# EAGLE board radio_V12.08.21 (EAGLE 5.01)
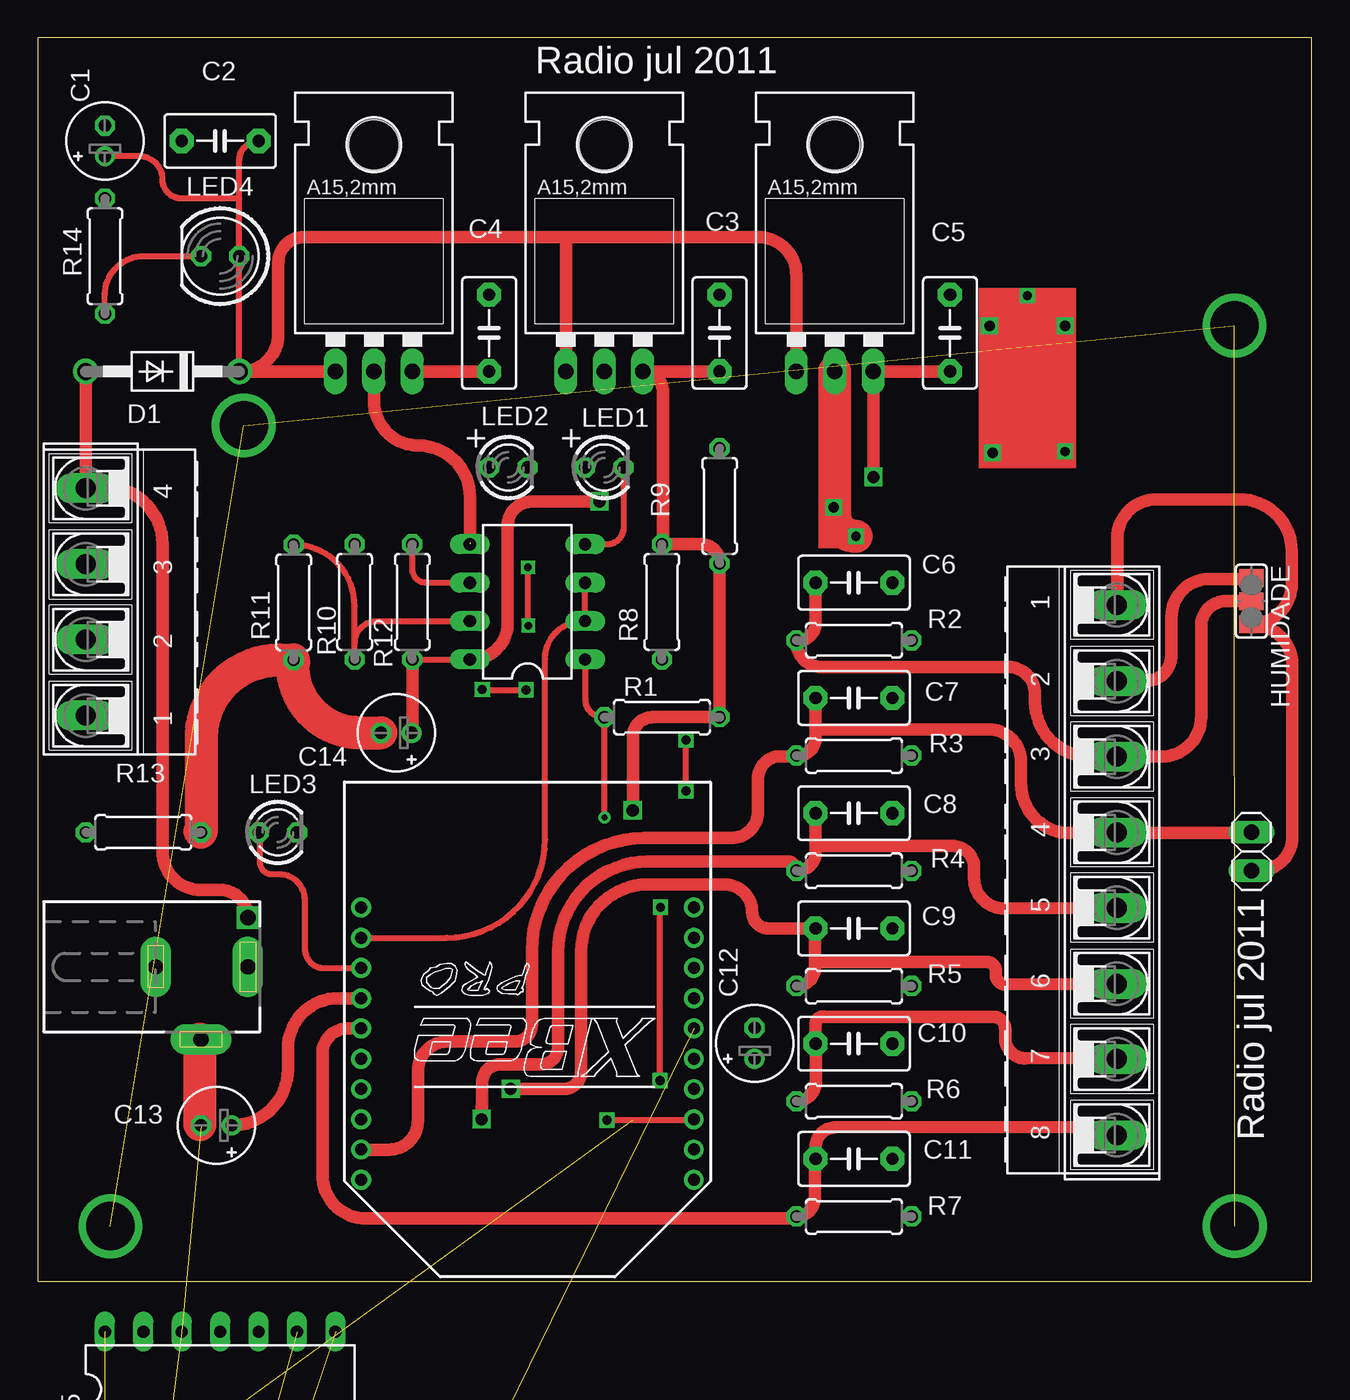
[diagram p0: board, top side]
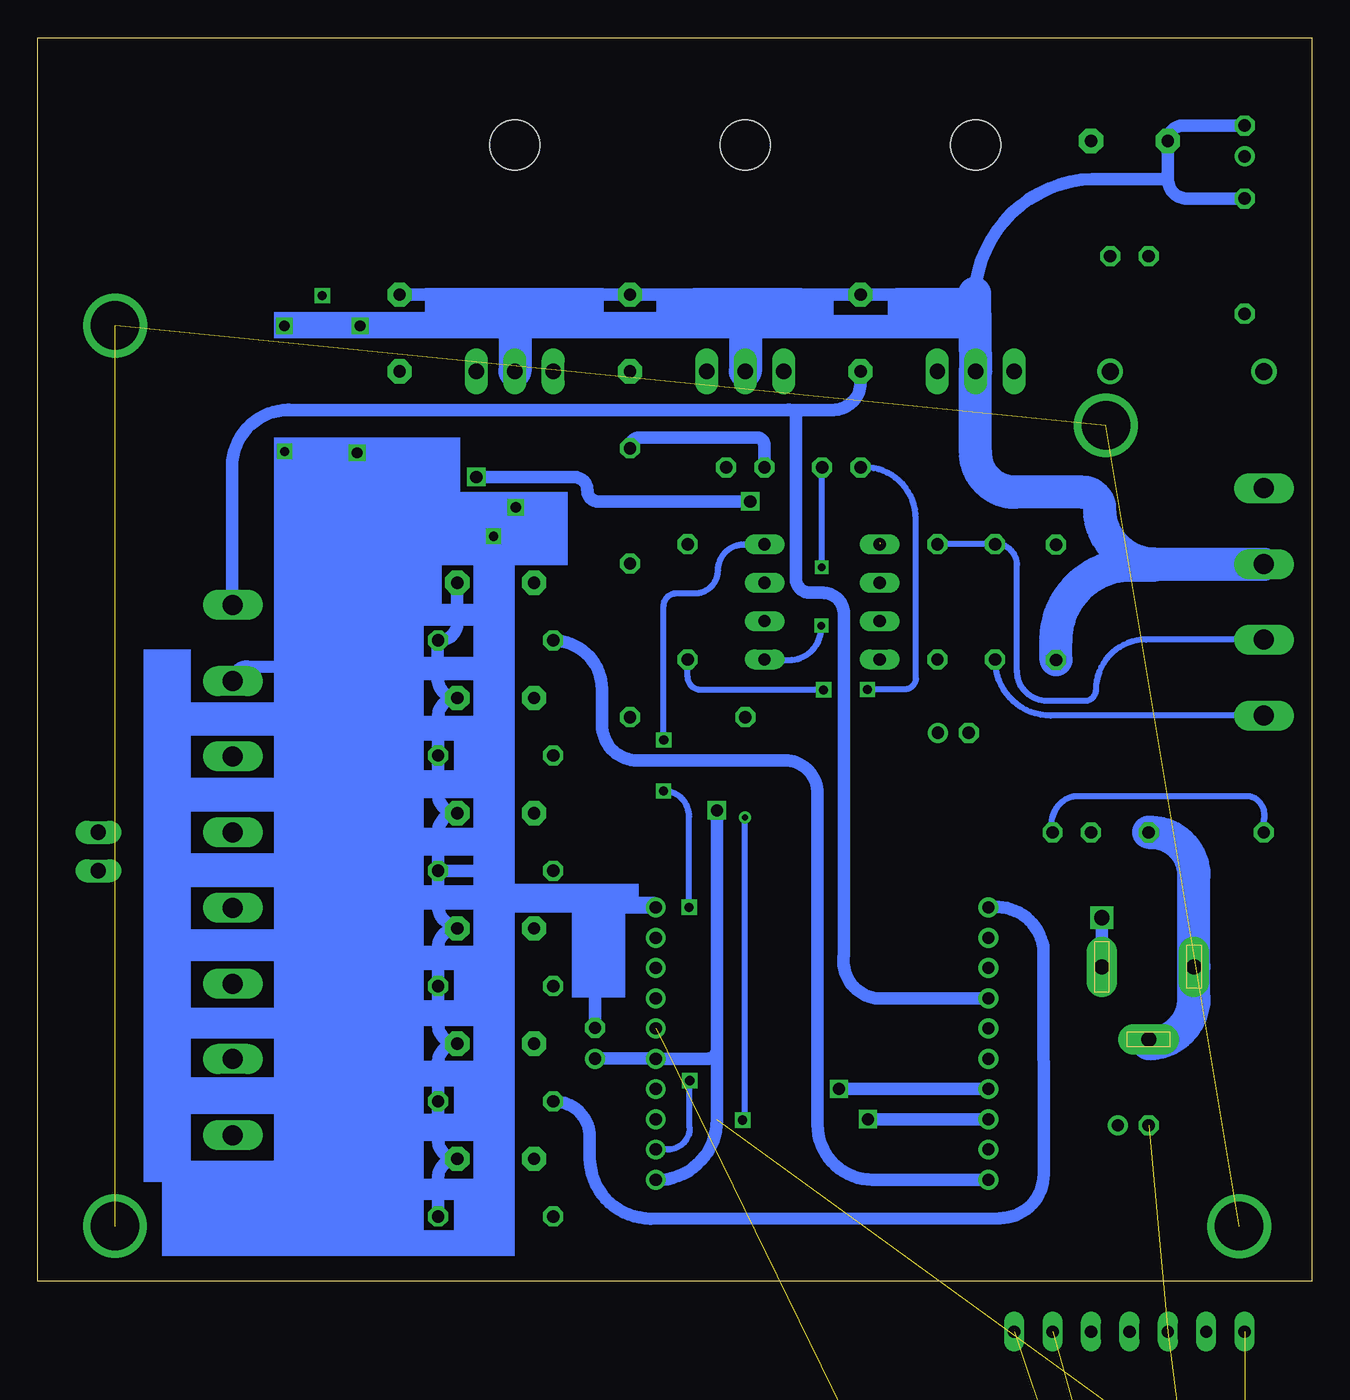
[diagram p1: board, bottom side, seen from below]

Size 84.24 x 82.22 mm. Coordinates in mm from the lower left corner, seen from the top.
Outline: 0,0 84.24,0 84.24,82.22 0,82.22 0,0
Copper layers (1*16): Top 0.035mm / dielectric 1.5mm / Bottom 0.035mm
Design rules "default": minimum track width 10mil, minimum drill 24mil, track to track 8mil, track to pad 8mil, pad to pad 8mil, via to via 8mil, smd to smd 8mil, copper to edge 40mil, drill to drill 8mil, minimum pad ring 10mil, minimum via ring 8mil, stop-mask expansion 4mil, vias tented up to drill 0mil, thermal gap 10mil

## Footprints (pad centres in the part's own frame; a part is rotated, then mirrored left to right if it is on the bottom)
E2-5 = drill 0.813 pad 1.27 round: + -1.016,0 | drill 0.813 pad 1.27 octagon: - 1.016,0
C5B3.5 = drill 0.813 pad 1.6 octagon: 1 -2.54,0; 2 2.54,0
DO41-10 = drill 1.118 round: A 5.08,0; C -5.08,0
SJ_2 = smd 1.168 x 1.6: 1 -1.524,0; 2 0,0; 3 1.524,0
78XXL = drill 1.016 long: GND 0,-3.81; IN -2.54,-3.81; OUT 2.54,-3.81 | hole 3.302: 0,11.176
DIL08 = drill 0.813 long: 1 -3.81,-3.81; 2 -1.27,-3.81; 3 1.27,-3.81; 4 3.81,-3.81; 5 3.81,3.81; 6 1.27,3.81; 7 -1.27,3.81; 8 -3.81,3.81
DIL14 = drill 0.813 long: 1 -7.62,-3.81; 2 -5.08,-3.81; 3 -2.54,-3.81; 4 0,-3.81; 5 2.54,-3.81; 6 5.08,-3.81; 7 7.62,-3.81; 8 7.62,3.81; 9 5.08,3.81; 10 2.54,3.81; 11 0,3.81; 12 -2.54,3.81; 13 -5.08,3.81; 14 -7.62,3.81
DCJ0202 = drill 1 pad 2 long: 1 0,3.1; 2 4.8,0; 3 0,-3
1X02 = drill 1.016 long: 1 -1.27,0; 2 1.27,0
LED3MM = drill 0.813 octagon: A -1.27,0; K 1.27,0
LED5MM = drill 0.813 octagon: A -1.27,0; K 1.27,0
0207/7 = drill 0.813 octagon: 1 -3.81,0; 2 3.81,0
AK500/4-H = drill 1.321 long: 1 -7.518,0; 2 -2.489,0; 3 2.489,0; 4 7.518,0
AK500/8-H = drill 1.321 long: 1 -17.526,0; 2 -12.497,0; 3 -7.518,0; 4 -2.489,0; 5 2.489,0; 6 7.518,0; 7 12.497,0; 8 17.526,0
XBEE-PRO = drill 0.8 pad 1.27 round: 1 -11,9; 2 -11,7; 3 -11,5; 4 -11,3; 5 -11,1; 6 -11,-1; 7 -11,-3; 8 -11,-5; 9 -11,-7; 10 -11,-9; 11 11,-9; 12 11,-7; 13 11,-5; 14 11,-3; 15 11,-1; 16 11,1; 17 11,3; 18 11,5; 19 11,7; 20 11,9

## Placement (x,y rotation side)
C1  10uF  [E2-5]  4.44,75.4 90 top
C2  220nF  [C5B3.5]  12.06,75.4 180 top
C3  220nF  [C5B3.5]  45.08,62.7 90 top
C4  220nF  [C5B3.5]  29.84,62.7 90 top
C5  220nF  [C5B3.5]  60.32,62.7 90 top
C6  470nF  [C5B3.5]  53.97,46.19 180 top
C7  470nF  [C5B3.5]  53.97,38.57 180 top
C8  470nF  [C5B3.5]  53.97,30.95 180 top
C9  470nF  [C5B3.5]  53.97,23.33 180 top
C10  470nF  [C5B3.5]  53.97,15.71 180 top
C11  470nF  [C5B3.5]  53.97,8.09 180 top
C12  10uF  [E2-5]  47.4,15.73 90 top
C13  10uF  [E2-5]  11.81,10.3 180 top
C14  10uF  [E2-5]  23.71,36.27 180 top
C16  1.5u  [E2-5]  3.17,-79.54 0 top  (outside the outline)
D1  1N4004  [DO41-10]  8.25,60.16 180 top
HUMIDADE  [SJ_2]  80.24,44.97 270 top
IC1  3.3  [78XXL]  22.22,63.97 0 top
IC2  LM2937-3.3  [78XXL]  37.46,63.97 0 top
IC3  7805  [78XXL]  52.7,63.97 0 top
IC4  DS96176  [DIL08]  32.38,44.92 90 top
IC5  LM339N  [DIL14]  12.06,-7.15 0 top  (outside the outline)
J2  DCJ0202  [DCJ0202]  10.79,20.79 270 top
JP1  [1X02]  80.25,28.41 90 top
LED1  [LED3MM]  37.46,53.81 0 top
LED2  [LED3MM]  31.11,53.81 0 top
LED3  [LED3MM]  15.87,29.68 0 top
LED4  [LED5MM]  12.06,67.78 180 top
LED5  [LED3MM]  3.17,-16.04 0 top  (outside the outline)
LED6  [LED3MM]  3.17,-21.12 0 top  (outside the outline)
LED7  [LED3MM]  3.17,-26.2 0 top  (outside the outline)
R1  10k  [0207/7]  41.27,37.3 0 top
R2  30k  [0207/7]  53.97,42.38 0 top
R3  30k  [0207/7]  53.97,34.76 0 top
R4  30k  [0207/7]  53.97,27.14 0 top
R5  30k  [0207/7]  53.97,19.52 0 top
R6  30k  [0207/7]  53.97,11.9 0 top
R7  30k  [0207/7]  53.97,4.28 0 top
R8  470  [0207/7]  41.27,44.92 90 top
R9  470  [0207/7]  45.08,51.27 90 top
R10  120  [0207/7]  20.95,44.92 270 top
R11  560  [0207/7]  16.92,44.89 270 top
R12  560  [0207/7]  24.76,44.92 90 top
R13  470  [0207/7]  6.98,29.68 0 top
R14  560  [0207/7]  4.44,67.78 270 top
R15  470  [0207/7]  5.71,-32.55 0 top  (outside the outline)
R16  470  [0207/7]  5.71,-37.63 0 top  (outside the outline)
R17  470  [0207/7]  5.71,-42.71 0 top  (outside the outline)
R18  68k  [0207/7]  5.71,-47.79 0 top  (outside the outline)
R19  56k  [0207/7]  5.71,-52.87 0 top  (outside the outline)
R20  56k  [0207/7]  5.71,-57.95 0 top  (outside the outline)
R21  150k  [0207/7]  5.71,-63.03 0 top  (outside the outline)
R22  100k  [0207/7]  5.71,-68.11 0 top  (outside the outline)
X3  [AK500/4-H]  3.17,44.92 90 top
X4  [AK500/8-H]  71.35,27.19 270 top
XB1  XBEEXBP09DM  [XBEE-PRO]  32.38,15.71 180 top

## Library data of the parts
C1 C12-C14 C16 = rcl
C2-C11 = capacitor-wima
D1 = diode
HUMIDADE = jumper
IC1-IC3 = v-reg
IC4 = maxim
IC5 = linear
J2 = con-jack
JP1 = pinhead
LED1-LED7 = led
R1-R22 = resistor
X3 X4 = con-ptr500
XB1 = maxstream3

## Nets
+3V3: C3.1 C12.+ IC2.OUT IC5.3 R1.2 R8.2 R9.1 R15.1 R16.1 R17.1 R18.2 XB1.1 XB1.5
+5V: C5.1 C14.+ IC3.OUT IC4.8 R12.1
+12V: D1.A J2.1 X3.4
CTS: IC4.2 IC4.3 XB1.12
DIN: IC4.4 LED1.K XB1.2
DIO12: XB1.4
N$2: C1.+ C2.1 D1.C IC1.IN IC2.IN IC3.IN LED4.A
N$3: C6.2 HUMIDADE.2 R2.1 X4.3 XB1.20
N$4: C7.2 JP1.2 R3.1 X4.4 XB1.19
N$5: C8.2 R4.1 X4.5 XB1.18
N$6: C9.2 R5.1 X4.6 XB1.17
N$7: C10.2 R6.1 X4.7 XB1.11
N$8: C11.2 R7.1 X4.8 XB1.15
N$10: LED2.A R8.1
N$11: LED1.A R9.2
N$12: IC4.1 LED2.K R1.1 XB1.3
N$13: LED3.A XB1.13
N$14: LED3.K R13.1
N$15: LED4.K R14.2
N$16: IC4.6 R10.1 R12.2 X3.2
N$17: IC4.7 R10.2 R11.1 X3.1
N$24: IC5.2 LED5.K
N$25: IC5.1 LED6.K
N$26: IC5.14 LED7.K
N$27: LED7.A R17.2
N$28: LED6.A R16.2
N$29: LED5.A R15.2
N$30: IC5.5 R18.1 R19.2
N$31: IC5.7 R19.1 R20.2
N$32: IC5.9 R20.1 R21.2
N$33: C16.+ IC5.4 IC5.6 IC5.8 R22.2
N$36: R22.1 XB1.6
PE: C1.- C2.2 C3.2 C4.2 C5.2 C6.1 C7.1 C8.1 C9.1 C10.1 C11.1 C12.- C13.- C14.- C16.- HUMIDADE.1 IC1.GND IC2.GND IC3.GND IC4.5 IC5.12 J2.2 J2.3 R2.2 R3.2 R4.2 R5.2 R6.2 R7.2 R11.2 R13.2 R14.1 R21.1 X3.3 X4.2 XB1.10
RESERVED: XB1.8
VCC: C4.1 C13.+ HUMIDADE.3 IC1.OUT JP1.1 X4.1 XB1.14

## Tracks (layer width: path | path; a pad name or v marks a point on that pad's centre or on a via)
+3V3  (via drill 0.8 pad 0.81)  (5 unrouted)
  Top 0.406: R1.2 arc90 45.08,37.32 | 45.06,47.48 arc-90 R9.1
  Top 0.813: IC2.OUT C3.1 | IC2.OUT arc-90 IC2.OUT | R9.1 R9.1 arc90 45.11,47.48 arc90 43.85,48.73 R8.2 arc90 41.3,48.7 41.34,48.7 41.34,58.82 arc90 IC2.OUT | R1.2 arc90 R1.2 arc-90 R1.2 | R1.2 | R1.2 R9.1 | R1.2 40.66,37.3 arc90 39.34,35.98 v39.34,31.14
  Bottom 0.813: XB1.1 43.35,6.71 arc90 43.32,6.68 arc-90 39.34,10.66 39.34,15.32 | 39.34,15.32 v39.34,31.14 | 39.34,15.32 39.33,15.32 arc90 39.94,14.71 XB1.5 arc-90 XB1.5 C12.+ arc-90 C12.+
+5V  (via drill 0.8 pad 0.81)
  Top 0.406: 28.63,41.11 arc90 28.65,41.13 arc-90 28.63,41.11 | R12.1 IC4.8 28.63,41.11
  Top 0.813: C5.1 IC3.OUT 55.24,53.19 arc90 v55.25,53.18 | v37.14,51.57 32.69,51.56 arc90 31.07,49.93 31.07,43.48 arc-90 28.71,41.12 arc-90 28.7,41.11 IC4.8 | R12.1 arc90 24.78,41.09 24.8,41.09 24.8,36.34 arc-90 C14.+
  Bottom 0.813: v55.25,53.18 48.8,53.18 arc90 47.91,52.29 arc-90 47.17,51.56 v37.14,51.57
+12V  (via drill 1 pad 1.02)
  Top 0.813: v13.89,24.04 arc90 12.06,25.87 10.79,25.87 arc-90 8.25,28.41 8.25,48.73 arc90 4.44,52.54 3.17,52.54 X3.4 D1.A
  Bottom 0.813: J2.1 v13.89,24.04
CTS
  Top 0.406: XB1.12 27.06,22.71 arc90 33.54,29.2 33.54,41.16 arc-90 36.03,43.64 arc-90 36.04,43.65 IC4.2 36.19,46.18 arc90 36.17,46.2 arc90 36.18,46.19 IC4.3
DIN  (via drill 0.6)
  Top 0.406: IC4.4 37.64,48.73 arc90 38.76,49.85 38.76,53.75 arc-90 38.73,53.77 LED1.K | v41.14,13.27 41.14,24.69 arc-90 v41.17,24.73 | v42.86,32.41 42.86,35.78 arc90 v42.85,35.79
  Bottom 0.406: XB1.2 42.58,8.71 arc-90 41.14,10.15 v41.14,13.27 | v41.17,24.73 41.17,30.72 arc-90 v42.86,32.41 | v42.85,35.79 42.85,44.66 arc90 42.03,45.49 40.79,45.49 arc-90 39.26,47.02 arc90 37.56,48.72 IC4.4 | IC4.4 | IC4.4 arc90 IC4.4
N$1  (via drill 3.2 pad 3.81)  (3 unrouted)
  other vias: 4.8,3.64 79.14,3.64 79.13,63.19 13.62,56.59
N$2
  Top 0.406: D1.C LED4.A 13.33,71.59 | 13.33,71.59 13.33,74.13 arc-90 C2.1 | C1.+ 6.73,74.38 arc-90 8.25,72.86 arc90 9.52,71.59 13.33,71.59
  Top 0.813: IC1.IN D1.C 13.45,60.16 arc-90 13.46,60.16 arc90 15.91,62.61 15.91,67.35 arc-90 17.61,69.05 34.92,69.05 | 34.92,69.05 47.62,69.05 arc-90 50.16,66.51 IC3.IN | 34.92,69.05 IC2.IN
N$3
  Top 0.813: C6.2 51.43,43.53 arc-90 50.26,42.36 arc90 50.23,42.38 R2.1 50.16,42.35 arc-90 50.14,42.33 arc90 51.86,40.61 64.18,40.61 arc-90 65.94,38.85 65.94,38.3 arc90 69.56,34.68 71.29,34.73 | HUMIDADE.2 78.55,44.97 arc90 76.92,43.34 76.92,37.3 arc-90 74.32,34.7 71.32,34.7 arc-90 71.29,34.73 | 71.29,34.73 arc90 71.31,34.71 X4.3
  Bottom 0.813: XB1.20 29.05,6.71 arc90 32.68,10.34 32.68,32.27 arc-90 34.85,34.44 44.58,34.44 arc90 46.94,36.79 46.94,39.16 arc-90 50.14,42.35 arc90 R2.1
N$4
  Top 0.813: 50.17,34.71 arc-90 50.16,34.71 R3.1 | 51.43,36.52 51.43,35.97 arc-90 50.17,34.71 | 51.43,36.52 C7.2 | 51.43,36.52 51.5,36.52 arc90 51.54,36.48 62.89,36.48 arc-90 65.02,34.36 65.02,32.89 arc90 68.27,29.63 X4.4 arc-90 71.33,29.66 | 50.17,34.71 49.08,34.71 arc90 47.63,33.26 47.63,31.08 arc-90 45.85,29.3 40.13,29.3 arc90 32.67,21.84 32.67,16.96 arc-90 31.55,15.84 27.08,15.84 arc90 25.13,13.9 25.13,10.61 arc-90 23.22,8.7 21.64,8.7 arc90 21.63,8.71 XB1.19 | 71.33,29.66 71.29,29.66 | JP1.2 arc-90 80.22,29.66 71.33,29.66
N$5  (via drill 0.8 pad 0.81)
  Top 0.813: 51.43,28.72 51.43,28.32 arc-90 50.27,27.17 arc-90 50.25,27.14 R4.1 50.16,27.2 arc90 50.14,27.22 arc90 49.62,27.74 40.34,27.74 arc90 34.39,21.79 34.39,15.44 arc-90 33.28,14.33 30.55,14.33 arc90 29.39,13.16 29.39,11.54 arc-90 29.38,11.53 arc90 29.35,11.5 v29.35,10.71 | 51.43,28.72 C8.2 | X4.5 63.89,24.65 arc-90 61.91,26.63 61.91,27.36 arc90 60.49,28.78 51.56,28.78 arc90 51.51,28.72 51.43,28.72
  Bottom 0.813: XB1.18 v29.35,10.71 arc90 v29.35,10.71
N$6  (via drill 0.8 pad 0.81)
  Top 0.813: C9.2 arc90 51.4,23.3 51.4,21.14 | R5.1 arc90 51.4,20.76 51.4,21.14 | X4.6 63.97,19.62 arc-90 63.35,20.24 63.35,20.53 arc90 62.77,21.11 51.45,21.11 arc-90 51.41,21.14 51.4,21.14 | v31.27,12.72 34.81,12.72 arc90 35.93,13.84 35.93,21.83 arc-90 40.34,26.24 45.4,26.24 arc-90 47.24,24.4 arc90 48.32,23.33 C9.2 | C9.2 arc-90 C9.2
  Bottom 0.813: XB1.17 v31.26,12.71 arc90 v31.27,12.72
N$7
  Top 0.813: R6.1 arc90 51.45,13.19 51.45,15.69 arc90 C10.2 51.43,16.99 arc-90 51.94,17.5 arc90 51.96,17.49 63.17,17.49 arc-90 63.97,16.7 63.97,16.09 arc90 65.32,14.73 71.48,14.78 arc-90 71.51,14.75 arc-90 71.45,14.69 X4.7
  Bottom 0.813: XB1.11 21.31,24.71 arc90 17.77,22.11 17.73,7.07 arc90 20.63,4.18 43.72,4.14 arc90 47.75,8.17 47.75,9.55 arc-90 50.06,11.87 arc-90 50.1,11.9 R6.1
N$8
  Top 0.813: X4.8 71.35,9.7 arc90 71.33,9.72 arc90 70.82,10.22 52.76,10.17 arc90 51.43,8.85 C11.2 arc90 51.38,8.04 51.38,5.5 arc-90 R7.1 R7.1 arc-90 50.25,4.2 arc-90 50.19,4.14 21.71,4.14 arc-90 18.82,7.04 18.82,15.05 arc-90 20.47,16.71 XB1.15
N$9  (via drill 0.7 pad 1.02)
  other vias: 62.93,63.17
N$10  (via drill 0.6)
  Top 0.406: v32.28,39.1 29.42,39.1 arc-90 v29.39,39.13
  Bottom 0.406: R8.1 41.27,39.95 arc-90 40.42,39.1 v32.28,39.1 | v29.39,39.13 26.95,39.13 arc-90 26.18,39.9 26.18,50.42 arc-90 29.59,53.83 arc90 29.6,53.81 LED2.A
N$11
  Bottom 0.813: LED1.A 36.19,55.25 arc-90 36.73,55.79 44.44,55.79 arc-90 45.12,55.11 arc-90 45.09,55.08 R9.2
N$12  (via drill 0.4, 0.5 pad 0.81, 0.6)
  Top 0.406: v32.41,47.21 32.41,43.37 arc90 v32.43,43.35 | R1.1 arc-90 37.43,37.27 arc-90 36.22,38.47 36.2,38.47 36.2,41.11 IC4.1 | R1.1 | R1.1 37.46,30.68 arc90 v37.48,30.67 | XB1.3 XB1.3 arc90 43.43,10.66 v37.64,10.66
  Bottom 0.406: LED2.K 32.38,47.24 arc90 v32.41,47.21 | v32.43,43.35 32.43,43.22 arc90 34.58,41.07 36.19,41.07 IC4.1 arc-90 IC4.1 | v37.48,30.67 37.48,10.82 arc90 v37.64,10.66
N$13
  Top 0.406: XB1.13 18.91,20.71 arc-90 17.66,21.95 17.66,25.2 arc90 15.96,26.9 15.5,26.9 arc-90 14.69,27.71 14.69,29.45 arc90 14.54,29.61 arc90 LED3.A
N$14
  Bottom 0.406: R13.1 3.17,30.46 arc-90 4.06,32.05 15.79,32.05 arc-90 17.17,29.78 arc90 17.14,29.75 LED3.K
N$15
  Top 0.406: R14.2 4.44,65.24 arc-90 6.98,67.78 LED4.K
N$16
  Top 0.406: R12.2 24.76,47.08 arc90 25.64,46.21 28.45,46.21 arc-90 28.52,46.14 arc90 IC4.6
  Bottom 0.406: R12.2 R10.1 arc90 20.93,48.75 20.88,48.75 arc90 19.49,47.36 19.49,40.35 arc-90 17.5,38.37 15.03,38.37 arc-90 14.28,39.12 arc90 10.96,42.43 X3.2
N$17
  Top 0.406: IC4.7 IC4.7 arc90 IC4.7 22.42,43.64 arc90 20.95,42.18 R10.2 arc90 R10.2 | R10.2 20.95,41.05 | R11.1 arc-90 20.95,44.67 R10.2
  Bottom 0.406: R10.2 20.95,41.07 arc-90 20.93,41.05 arc-90 17.28,37.4 X3.1
N$19  (via drill 0.7 pad 1.02)
  other vias: 67.93,63.17
N$20  (via drill 0.7 pad 1.02)
  other vias: 52.63,51.17
N$21  (via drill 0.7 pad 1.02)
  other vias: 63.13,54.77
N$22  (via drill 0.6)
  other vias: 67.93,54.87
N$23  (via drill 0.6)
  other vias: 65.43,65.17
N$24  (1 unrouted)
N$25  (1 unrouted)
N$26  (1 unrouted)
N$27  (1 unrouted)
N$28  (1 unrouted)
N$29  (1 unrouted)
N$30  (2 unrouted)
N$31  (2 unrouted)
N$32  (2 unrouted)
N$33  (4 unrouted)
N$36  (1 unrouted)
PE  (via drill 0.6)  (4 unrouted)
  Top 0.813: X4.2 73.24,39.68 arc90 74.97,41.41 74.97,43.93 arc-90 77.46,46.43 80.28,46.43 arc90 80.36,46.51 arc-90 80.34,46.49 HUMIDADE.1 80.32,46.49 arc-90 80.33,46.48 | IC4.5 28.57,51.87 arc90 25.19,55.26 arc-90 22.23,58.22 IC1.GND IC1.GND arc-90 IC1.GND | 52.71,60.15 arc90 IC3.GND arc-90 52.69,60.17 52.69,60.18 | 10.73,16 J2.2 arc-90 J2.2 | 10.73,10.36 arc90 C13.-
  Top 2.184: 10.73,10.36 10.73,16 | v54.11,49.25 arc-90 52.69,50.68 52.69,60.17 | R13.2 10.79,29.71 arc90 10.73,29.77 arc90 10.83,29.87 10.83,35.97 arc-90 15.94,41.08 R11.2 16.92,40.86 arc-90 16.83,40.77 arc90 21.33,36.27 C14.-
  Bottom 0.406: IC1.GND 22.22,62.7
  Bottom 0.813: R14.1 8.25,71.59 arc90 9.52,72.86 | 9.52,72.86 C2.2 arc90 8.5,76.42 C1.- | 22.22,62.7 arc-90 24.76,65.24 C4.2 34.92,65.24 arc-90 37.46,62.7 arc-90 40,65.24 C3.2 50.16,65.24 arc-90 52.7,62.7 arc-90 55.24,65.24 arc0 60.29,65.22 C5.2 | 22.28,65.32 arc90 13.76,72.87 9.52,72.86 | J2.2 10.79,15.71 | C10.1 arc-90 57.78,14.44 R6.2 57.78,9.36 arc-90 C11.1 arc-90 57.78,6.82 R7.2 | C10.1 arc90 57.78,16.98 R5.2 57.78,22.06 arc90 C9.1 56.51,23.52 arc90 57.77,24.79 R4.2 | 57.8,40.59 57.8,39.86 arc-90 C7.1 arc-90 57.78,37.3 R3.2 57.78,32.22 arc-90 C8.1 arc-90 57.78,29.68 R4.2 arc90 R4.2 | 57.8,40.59 57.8,42.38 R2.2 arc-90 R2.2 57.65,42.38 arc-90 57.64,42.38 arc-90 56.51,43.52 56.51,46.12 arc-90 56.52,46.13 arc-90 56.51,46.14 C6.1 | X4.2 arc90 70.4,40.64 57.8,40.59 | 56.59,15.69 arc90 56.57,15.71 C10.1 | 28.56,48.83 arc-90 28.57,48.83 | C12.- C12.- arc90 47.34,16.69 arc90 C12.- 47.4,23.02 arc90 45.71,24.71 XB1.10 43.33,24.71 arc-90 43.31,24.72 arc-90 43.6,25.01 52.35,25.01 arc90 54.11,26.76 54.11,28.07 | v54.11,49.25 54.11,28.07 | 54.11,28.07 54.11,28.07 arc90 55.05,27.13 R4.2
  Bottom 2.184: 37.46,62.7 IC2.GND | 52.7,62.7 IC3.GND | 22.28,65.32 IC1.GND arc90 IC1.GND | 10.79,15.71 arc-90 7.79,18.71 J2.3 7.79,26.83 arc-90 10.63,29.67 arc-90 10.64,29.68 R13.2 | 10.33,47.41 X3.3 | 10.33,47.41 10.37,47.41 arc90 14.03,51.07 arc-90 15.13,52.17 19.63,52.17 arc90 22.23,54.77 IC1.GND | IC1.GND 22.23,60.37 | R11.2 16.92,42.38 arc90 11.93,47.37 10.33,47.37 10.33,47.41
VCC
  Top 0.813: C4.1 IC1.OUT | JP1.1 80.71,27.14 arc90 82.96,29.4 82.96,40.72 arc90 HUMIDADE.3 arc90 82.91,46.12 82.91,48.29 arc90 79.51,51.7 73.95,51.7 arc90 71.38,49.13 71.38,44.69 71.37,44.69 arc-90 X4.1 | C13.+ arc90 16.55,14.03 16.55,15.41 arc-90 19.85,18.71 XB1.14 arc-90 XB1.14
  Bottom 0.813: C4.1 29.84,59.42 arc90 31.64,57.62 34.02,57.62 | 34.02,57.62 34.62,57.62 | XB1.14 28.85,18.71 arc90 30.94,21.61 30.94,44.13 arc-90 32.34,45.52 33.19,45.52 arc90 34.12,46.45 34.12,57.49 arc90 34.02,57.58 34.02,57.62 | 34.62,57.62 34.62,57.65 arc90 34.58,57.62 | 34.62,57.62 67.67,57.62 arc-90 67.68,57.61 | 67.68,57.61 arc90 67.66,57.62 | X4.1 71.39,44.71 71.39,53.89 arc90 67.68,57.61 | X4.1 arc-90 X4.1
(copper drawn outside any net)
  shapes: Bottom area x43, Top area x3

## Text on the board
tNames: Radio jul 2011 | + | + | Radio jul 2011